# EAGLE board gameboyzero-new (EAGLE 8.4.1)

Size 908.1 x 453.35 mm. Coordinates in mm from the lower left corner, seen from the top.
Outline: 33.1,311.35 arc-90 32.1,312.35 32.1,404.35 arc-90 33.1,405.35 102.1,405.35 arc-90 103.1,404.35 103.1,312.35 arc-90 102.1,311.35
Outline: 32.1,306.25 32.1,280.25 94.1,280.25 94.1,270.25 60.1,270.25 60.1,267.25 75.1,267.25 75.1,256.25 60.1,256.25 60.1,252.25 32.1,252.25 32.1,214.25
Outline: 32.1,214.25 arc90 33.1,213.25
Outline: 102.1,213.25 arc90 103.1,214.25
Outline: 103.1,214.25 103.1,280.25 98.1,280.25 98.1,299.25 103.1,299.25 103.1,306.25
Outline: 103.1,306.25 arc90 102.1,307.25
Outline: 33.1,307.25 arc90 32.1,306.25
Outline: 32.1,214.25 arc90 33.1,213.25
Outline: 102.1,213.25 arc90 103.1,214.25
Outline: 103.1,306.25 arc90 102.1,307.25
Outline: 102.1,307.25 33.1,307.25
Outline: 33.1,307.25 arc90 32.1,306.25
Outline: 32.1,64.25 32.1,82.25 94.1,82.25 94.1,92.25 32.1,92.25 32.1,118.25 arc-90 33.1,119.25
Outline: 103.1,55.25 103.1,118.25 arc90 102.1,119.25
Outline: 40.1,64.25 95.1,64.25 95.1,55.25
Outline: 95.1,55.25 103.1,55.25
Outline: 103.1,55.25 103.1,37.25 103.1,27.25 103.1,1.25 arc-90 102.1,0.25 33.1,0.25 arc-90 32.1,1.25 32.1,64.25
Outline: 95.1,55.25 40.1,55.25 40.1,64.25
Outline: 40.1,64.25 32.1,64.25
Outline: 32.1,212.25 32.1,186.25 94.1,186.25 94.1,176.25 60.1,176.25 60.1,173.25 75.1,173.25 75.1,162.25 60.1,162.25 60.1,158.25 32.1,158.25 32.1,120.25
Outline: 32.1,120.25 arc90 33.1,119.25
Outline: 102.1,119.25 arc90 103.1,120.25
Outline: 103.1,120.25 103.1,186.25 103.1,205.25 103.1,212.25
Outline: 103.1,212.25 arc90 102.1,213.25
Outline: 33.1,213.25 arc90 32.1,212.25
Outline: 32.1,120.25 arc90 33.1,119.25
Outline: 33.1,119.25 102.1,119.25
Outline: 102.1,119.25 arc90 103.1,120.25
Outline: 103.1,212.25 arc90 102.1,213.25
Outline: 102.1,213.25 33.1,213.25
Outline: 33.1,213.25 arc90 32.1,212.25
Outline: 837.1,311.35 837.1,285.35 899.1,285.35 899.1,275.35 865.1,275.35 865.1,272.35 880.1,272.35 880.1,261.35 865.1,261.35 865.1,257.35 837.1,257.35 837.1,219.35
Outline: 837.1,219.35 arc90 838.1,218.35
Outline: 907.1,218.35 arc90 908.1,219.35
Outline: 908.1,219.35 908.1,285.35 903.1,285.35 903.1,304.35 908.1,304.35 908.1,311.35
Outline: 908.1,311.35 arc90 907.1,312.35
Outline: 838.1,312.35 arc90 837.1,311.35
Outline: 837.1,219.35 arc90 838.1,218.35
Outline: 838.1,218.35 907.1,218.35
Outline: 907.1,218.35 arc90 908.1,219.35
Outline: 908.1,311.35 arc90 907.1,312.35
Outline: 907.1,312.35 838.1,312.35
Outline: 838.1,312.35 arc90 837.1,311.35
Outline: 837.1,216.35 837.1,190.35 899.1,190.35 899.1,180.35 865.1,180.35 865.1,177.35 880.1,177.35 880.1,166.35 865.1,166.35 865.1,162.35 837.1,162.35 837.1,124.35
Outline: 837.1,124.35 arc90 838.1,123.35
Outline: 907.1,123.35 arc90 908.1,124.35
Outline: 908.1,124.35 908.1,190.35 908.1,209.35 908.1,216.35
Outline: 908.1,216.35 arc90 907.1,217.35
Outline: 838.1,217.35 arc90 837.1,216.35
Outline: 837.1,124.35 arc90 838.1,123.35
Outline: 838.1,123.35 907.1,123.35
Outline: 907.1,123.35 arc90 908.1,124.35
Outline: 908.1,216.35 arc90 907.1,217.35
Outline: 907.1,217.35 838.1,217.35
Outline: 838.1,217.35 arc90 837.1,216.35
Outline: 78.76,340.55 67.56,344.63 arc90 66.92,344.33 62.47,332.11 arc90 62.77,331.47 73,327.75 69.1,317.05 81.79,312.43 arc90 82.43,312.73 85.19,320.3 96.39,316.23 arc90 97.03,316.53 101.47,328.74 arc90 101.18,329.38 91.42,332.93 arc-90 91.12,333.57 94.67,343.34 arc90 94.38,343.98 82.16,348.43 arc90 81.52,348.13 78.76,340.55
Outline: 47.45,340.5 59.25,328.7 arc-90 59.25,328 47.45,316.2 arc-90 46.75,316.2 34.95,328 arc-90 34.95,328.7 46.75,340.5 arc-90 47.45,340.5
Outline: 38.1,346.85 38.1,342.85 arc90 38.6,342.35 55.6,342.35 arc90 56.1,342.85 56.1,346.85 arc90 55.6,347.35 38.6,347.35 arc90 38.1,346.85
Outline: 0,25.4 0,0 25.4,0 25.4,25.4 0,25.4
Outline: 32.1,450.35 32.1,445.35 103.1,445.35 103.1,450.35 arc90 102.1,451.35 33.1,451.35 arc90 32.1,450.35
Outline: 32.1,444.35 32.1,407.35 arc90 33.1,406.35 102.1,406.35 arc90 103.1,407.35 103.1,444.35 32.1,444.35
Outline: 78.76,435.55 67.56,439.63 arc90 66.92,439.33 62.47,427.11 arc90 62.77,426.47 73,422.75 69.1,412.05 81.79,407.43 arc90 82.43,407.73 85.19,415.3 96.39,411.23 arc90 97.03,411.53 101.47,423.74 arc90 101.18,424.38 91.42,427.93 arc-90 91.12,428.57 94.67,438.34 arc90 94.38,438.98 82.16,443.43 arc90 81.52,443.13 78.76,435.55
Outline: 47.45,435.5 59.25,423.7 arc-90 59.25,423 47.45,411.2 arc-90 46.75,411.2 34.95,423 arc-90 34.95,423.7 46.75,435.5 arc-90 47.45,435.5
Outline: 38.1,441.85 38.1,437.85 arc90 38.6,437.35 55.6,437.35 arc90 56.1,437.85 56.1,441.85 arc90 55.6,442.35 38.6,442.35 arc90 38.1,441.85
Outline: 69.03,224.59 74.03,235.33 arc90 73.82,235.9 arc-90 73.58,236.57 80.02,250.37 arc-90 80.69,250.62 92.47,245.12 arc-90 92.71,244.46 86.79,231.76 arc90 87.03,231.09 arc-90 87.24,230.52 81.72,218.68 arc-90 81.05,218.43 69.27,223.93 arc-90 69.03,224.59
Outline: 65.93,223.93 54.15,218.43 arc-90 53.48,218.68 47.96,230.52 arc-90 48.17,231.09 arc90 48.41,231.76 42.49,244.46 arc-90 42.73,245.12 54.52,250.62 arc-90 55.18,250.37 61.62,236.57 arc-90 61.38,235.9 arc90 61.17,235.33 66.17,224.59 arc-90 65.93,223.93
Outline: 60.1,68.25 75.1,68.25 75.1,79.25 60.1,79.25 60.1,68.25
Outline: 69.03,130.59 74.03,141.33 arc90 73.82,141.9 arc-90 73.58,142.57 80.02,156.37 arc-90 80.69,156.62 92.47,151.12 arc-90 92.71,150.46 86.79,137.76 arc90 87.03,137.09 arc-90 87.24,136.52 81.72,124.67 arc-90 81.05,124.43 69.27,129.93 arc-90 69.03,130.59
Outline: 65.93,129.93 54.15,124.43 arc-90 53.48,124.67 47.96,136.52 arc-90 48.17,137.09 arc90 48.41,137.76 42.49,150.46 arc-90 42.73,151.12 54.52,156.62 arc-90 55.18,156.37 61.62,142.57 arc-90 61.38,141.9 arc90 61.17,141.33 66.17,130.59 arc-90 65.93,129.93
Outline: 837.1,406.35 837.1,314.35 arc90 838.1,313.35 907.1,313.35 arc90 908.1,314.35 908.1,406.35 arc90 907.1,407.35 838.1,407.35 arc90 837.1,406.35
Outline: 883.76,342.55 872.56,346.63 arc90 871.92,346.33 867.47,334.11 arc90 867.77,333.47 878,329.75 874.1,319.05 886.79,314.43 arc90 887.43,314.73 890.19,322.3 901.39,318.23 arc90 902.03,318.53 906.48,330.74 arc90 906.18,331.38 896.42,334.93 arc-90 896.12,335.57 899.67,345.34 arc90 899.38,345.98 887.16,350.43 arc90 886.52,350.13 883.76,342.55
Outline: 852.45,342.5 864.25,330.7 arc-90 864.25,330 852.45,318.2 arc-90 851.75,318.2 839.95,330 arc-90 839.95,330.7 851.75,342.5 arc-90 852.45,342.5
Outline: 843.1,348.85 843.1,344.85 arc90 843.6,344.35 860.6,344.35 arc90 861.1,344.85 861.1,348.85 arc90 860.6,349.35 843.6,349.35 arc90 843.1,348.85
Outline: 837.1,452.35 837.1,447.35 908.1,447.35 908.1,452.35 arc90 907.1,453.35 838.1,453.35 arc90 837.1,452.35
Outline: 837.1,446.35 837.1,409.35 arc90 838.1,408.35 907.1,408.35 arc90 908.1,409.35 908.1,446.35 837.1,446.35
Outline: 883.76,437.55 872.56,441.63 arc90 871.92,441.33 867.47,429.11 arc90 867.77,428.47 878,424.75 874.1,414.05 886.79,409.43 arc90 887.43,409.73 890.19,417.3 901.39,413.23 arc90 902.03,413.53 906.48,425.74 arc90 906.18,426.38 896.42,429.93 arc-90 896.12,430.57 899.67,440.34 arc90 899.38,440.98 887.16,445.43 arc90 886.52,445.13 883.76,437.55
Outline: 852.45,437.5 864.25,425.7 arc-90 864.25,425 852.45,413.2 arc-90 851.75,413.2 839.95,425 arc-90 839.95,425.7 851.75,437.5 arc-90 852.45,437.5
Outline: 843.1,443.85 843.1,439.85 arc90 843.6,439.35 860.6,439.35 arc90 861.1,439.85 861.1,443.85 arc90 860.6,444.35 843.6,444.35 arc90 843.1,443.85
Outline: 874.03,229.69 879.03,240.43 arc90 878.82,241 arc-90 878.58,241.67 885.02,255.47 arc-90 885.68,255.72 897.47,250.22 arc-90 897.71,249.56 891.79,236.86 arc90 892.03,236.19 arc-90 892.24,235.62 886.72,223.78 arc-90 886.05,223.53 874.27,229.03 arc-90 874.03,229.69
Outline: 870.93,229.03 859.15,223.53 arc-90 858.49,223.78 852.96,235.62 arc-90 853.17,236.19 arc90 853.41,236.86 847.49,249.56 arc-90 847.73,250.22 859.51,255.72 arc-90 860.18,255.47 866.62,241.67 arc-90 866.38,241 arc90 866.17,240.43 871.17,229.69 arc-90 870.93,229.03
Outline: 837.1,121.35 837.1,95.35 899.1,95.35 899.1,85.35 837.1,85.35 837.1,67.35 900.1,67.35 900.1,58.35 908.1,58.35 908.1,121.35 arc90 907.1,122.35 838.1,122.35 arc90 837.1,121.35
Outline: 865.1,71.35 880.1,71.35 880.1,82.35 865.1,82.35 865.1,71.35
Outline: 908.1,3.25 908.1,29.25 908.1,39.25 908.1,57.25 845.1,57.25 845.1,66.25 837.1,66.25 837.1,3.25 arc90 838.1,2.25 907.1,2.25 arc90 908.1,3.25
Outline: 874.03,134.69 879.03,145.43 arc90 878.82,146 arc-90 878.58,146.67 885.02,160.47 arc-90 885.68,160.72 897.47,155.22 arc-90 897.71,154.56 891.79,141.86 arc90 892.03,141.19 arc-90 892.24,140.62 886.72,128.78 arc-90 886.05,128.53 874.27,134.03 arc-90 874.03,134.69
Outline: 870.93,134.03 859.15,128.53 arc-90 858.49,128.78 852.96,140.62 arc-90 853.17,141.19 arc90 853.41,141.86 847.49,154.56 arc-90 847.73,155.22 859.51,160.72 arc-90 860.18,160.47 866.62,146.67 arc-90 866.38,146 arc90 866.17,145.43 871.17,134.69 arc-90 870.93,134.03
Copper layers (1*16): Top 0.035mm / dielectric 1.5mm / Bottom 0.035mm
Design rules "default": minimum track width 10mil, minimum drill 24mil, track to track 8mil, track to pad 8mil, pad to pad 8mil, via to via 8mil, smd to smd 8mil, copper to edge 40mil, drill to drill 8mil, minimum pad ring 10mil, minimum via ring 8mil, stop-mask expansion 4mil, vias tented up to drill 0mil, thermal gap 10mil

## Footprints (pad centres in the part's own frame; a part is rotated, then mirrored left to right if it is on the bottom)
2,8 = hole 2.8: 0,0

## Placement (x,y rotation side)
H1  MOUNT-HOLE2.8  [2,8]  36.1,60.25 180 top
H2  MOUNT-HOLE2.8  [2,8]  99.1,3.25 180 top
H3  MOUNT-HOLE2.8  [2,8]  99.1,59.25 0 top
H4  MOUNT-HOLE2.8  [2,8]  36.1,116.25 0 top
H5  MOUNT-HOLE2.8  [2,8]  99.1,116.25 0 top
H6  MOUNT-HOLE2.8  [2,8]  36.1,315.35 0 top
H7  MOUNT-HOLE2.8  [2,8]  99.1,315.35 0 top
H8  MOUNT-HOLE2.8  [2,8]  99.1,345.35 0 top
H9  MOUNT-HOLE2.8  [2,8]  36.1,402.35 0 top
H10  MOUNT-HOLE2.8  [2,8]  99.1,402.35 0 top
H11  MOUNT-HOLE2.8  [2,8]  36.1,410.35 0 top
H12  MOUNT-HOLE2.8  [2,8]  99.1,410.35 0 top
H13  MOUNT-HOLE2.8  [2,8]  99.1,440.35 0 top
H14  MOUNT-HOLE2.8  [2,8]  36.1,448.35 0 top
H15  MOUNT-HOLE2.8  [2,8]  99.1,448.35 0 top
H16  MOUNT-HOLE2.8  [2,8]  36.1,3.25 180 top
H17  MOUNT-HOLE2.8  [2,8]  36.1,123.25 0 top
H18  MOUNT-HOLE2.8  [2,8]  99.1,123.25 0 top
H19  MOUNT-HOLE2.8  [2,8]  99.1,153.25 0 top
H20  MOUNT-HOLE2.8  [2,8]  36.1,210.25 0 top
H21  MOUNT-HOLE2.8  [2,8]  99.1,210.25 0 top
H22  MOUNT-HOLE2.8  [2,8]  841.1,317.35 0 top
H23  MOUNT-HOLE2.8  [2,8]  904.1,317.35 0 top
H24  MOUNT-HOLE2.8  [2,8]  904.1,347.35 0 top
H25  MOUNT-HOLE2.8  [2,8]  841.1,404.35 0 top
H26  MOUNT-HOLE2.8  [2,8]  904.1,404.35 0 top
H27  MOUNT-HOLE2.8  [2,8]  36.1,217.25 0 top
H28  MOUNT-HOLE2.8  [2,8]  99.1,217.25 0 top
H29  MOUNT-HOLE2.8  [2,8]  99.1,247.25 0 top
H30  MOUNT-HOLE2.8  [2,8]  36.1,304.25 0 top
H31  MOUNT-HOLE2.8  [2,8]  99.1,304.25 0 top
H32  MOUNT-HOLE2.8  [2,8]  841.1,412.35 0 top
H33  MOUNT-HOLE2.8  [2,8]  904.1,412.35 0 top
H34  MOUNT-HOLE2.8  [2,8]  904.1,442.35 0 top
H35  MOUNT-HOLE2.8  [2,8]  841.1,450.35 0 top
H36  MOUNT-HOLE2.8  [2,8]  904.1,450.35 0 top
H37  MOUNT-HOLE2.8  [2,8]  841.1,222.35 0 top
H38  MOUNT-HOLE2.8  [2,8]  904.1,222.35 0 top
H39  MOUNT-HOLE2.8  [2,8]  904.1,252.35 0 top
H40  MOUNT-HOLE2.8  [2,8]  841.1,309.35 0 top
H41  MOUNT-HOLE2.8  [2,8]  904.1,309.35 0 top
H42  MOUNT-HOLE2.8  [2,8]  904.1,62.35 0 top
H43  MOUNT-HOLE2.8  [2,8]  841.1,119.35 0 top
H44  MOUNT-HOLE2.8  [2,8]  904.1,119.35 0 top
H45  MOUNT-HOLE2.8  [2,8]  841.1,62.25 180 top
H46  MOUNT-HOLE2.8  [2,8]  904.1,5.25 180 top
H47  MOUNT-HOLE2.8  [2,8]  841.1,5.25 180 top
H48  MOUNT-HOLE2.8  [2,8]  841.1,127.35 0 top
H49  MOUNT-HOLE2.8  [2,8]  904.1,127.35 0 top
H50  MOUNT-HOLE2.8  [2,8]  904.1,157.35 0 top
H51  MOUNT-HOLE2.8  [2,8]  841.1,214.35 0 top
H52  MOUNT-HOLE2.8  [2,8]  904.1,214.35 0 top

## Library data of the parts
H1-H52 = holes

## Text on the board
Dimension: 1" square / reference